# Altium PCB PCB_3U_DAC_BNC_Adapter.PCBDOC
Units mm, origin at the board's own origin, x right, y up, seen from the top; angles counter-clockwise.
Board outline 44.81 x 100 mm, 4 copper layers (TopLayer, Internal Plane 2, Signal Layer 1, BottomLayer), stack 1.563 mm thick; 29 components, 43 nets, 118 pads, 20 vias.
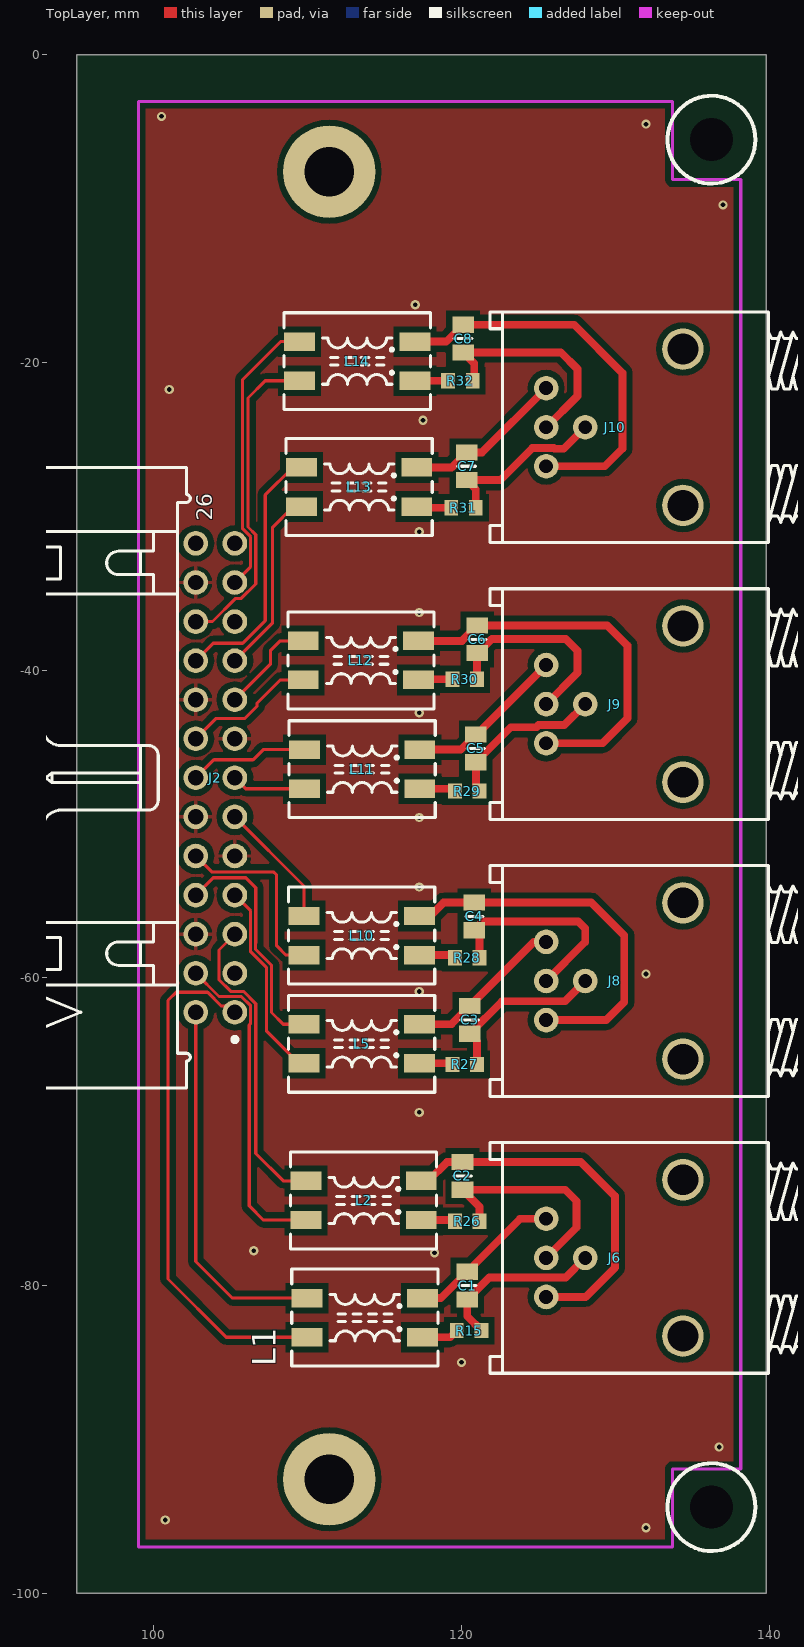
[diagram p0: TopLayer view]
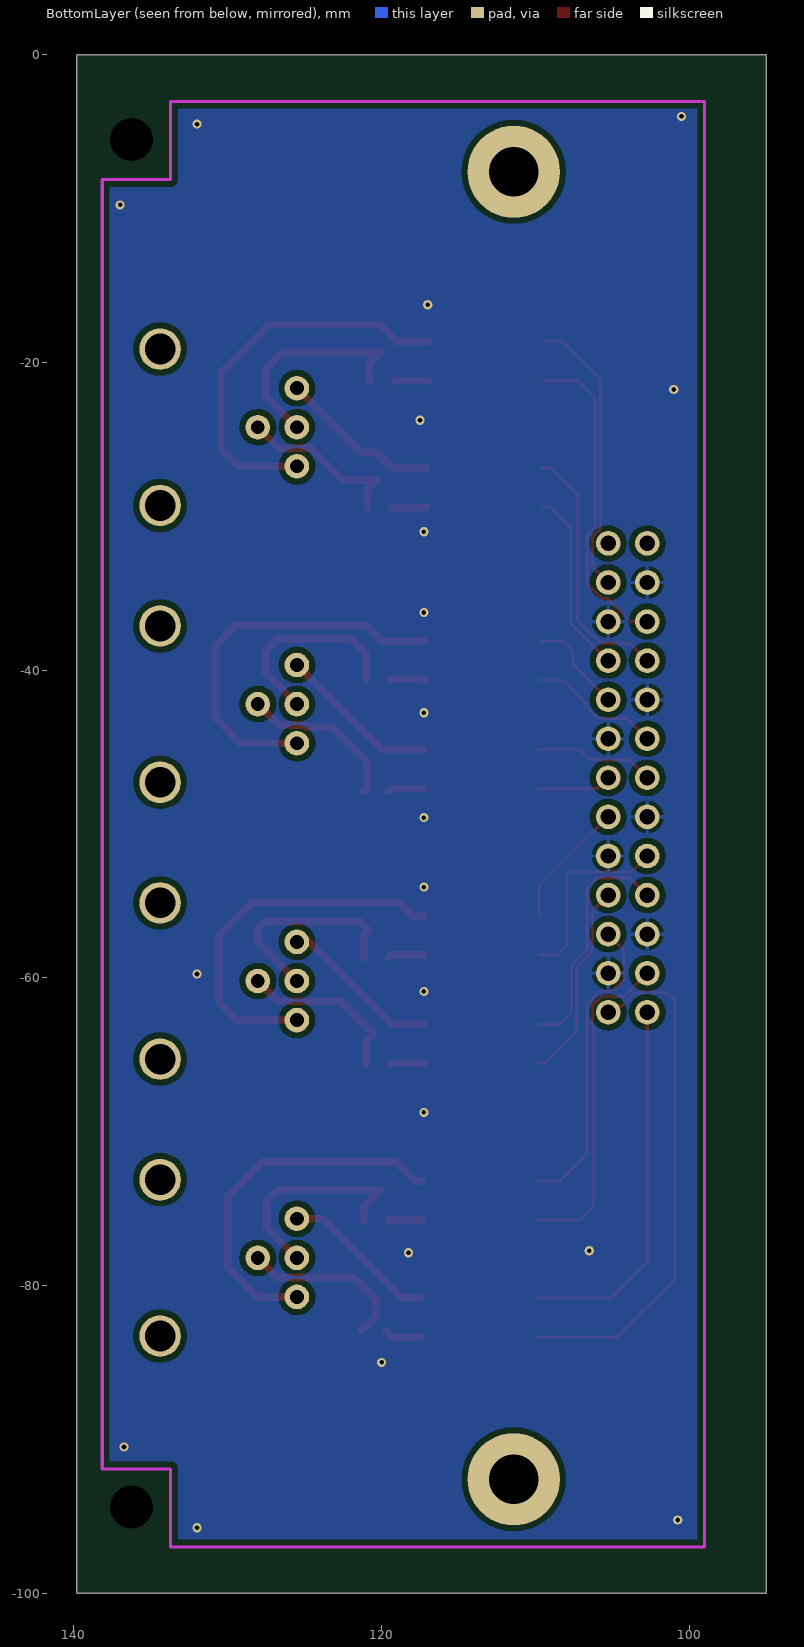
[diagram p1: BottomLayer view, seen from below]
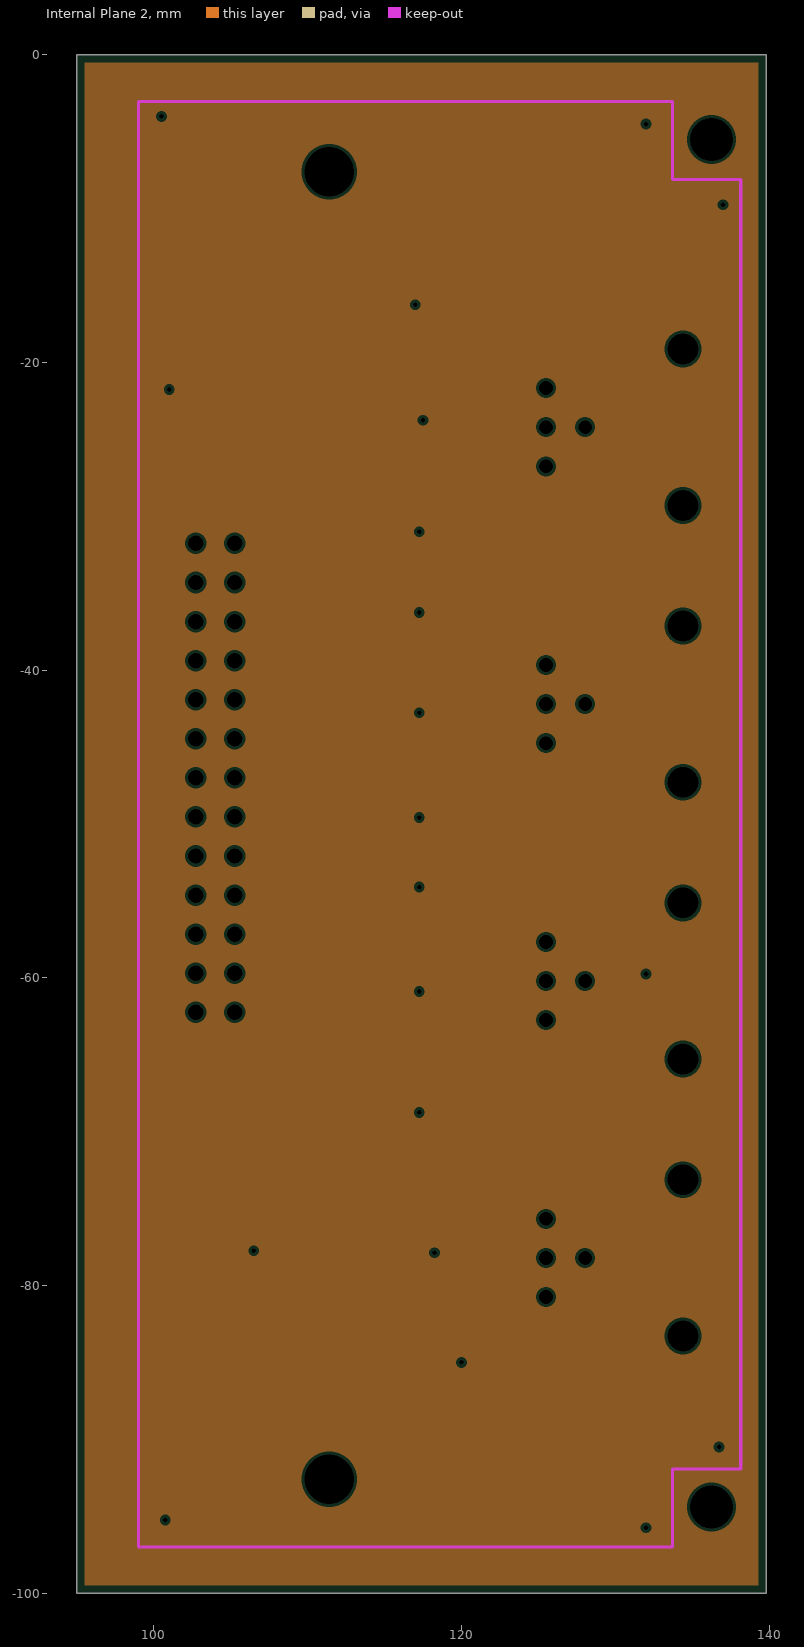
[diagram p2: Internal Plane 2, clearances drawn from the general rule]
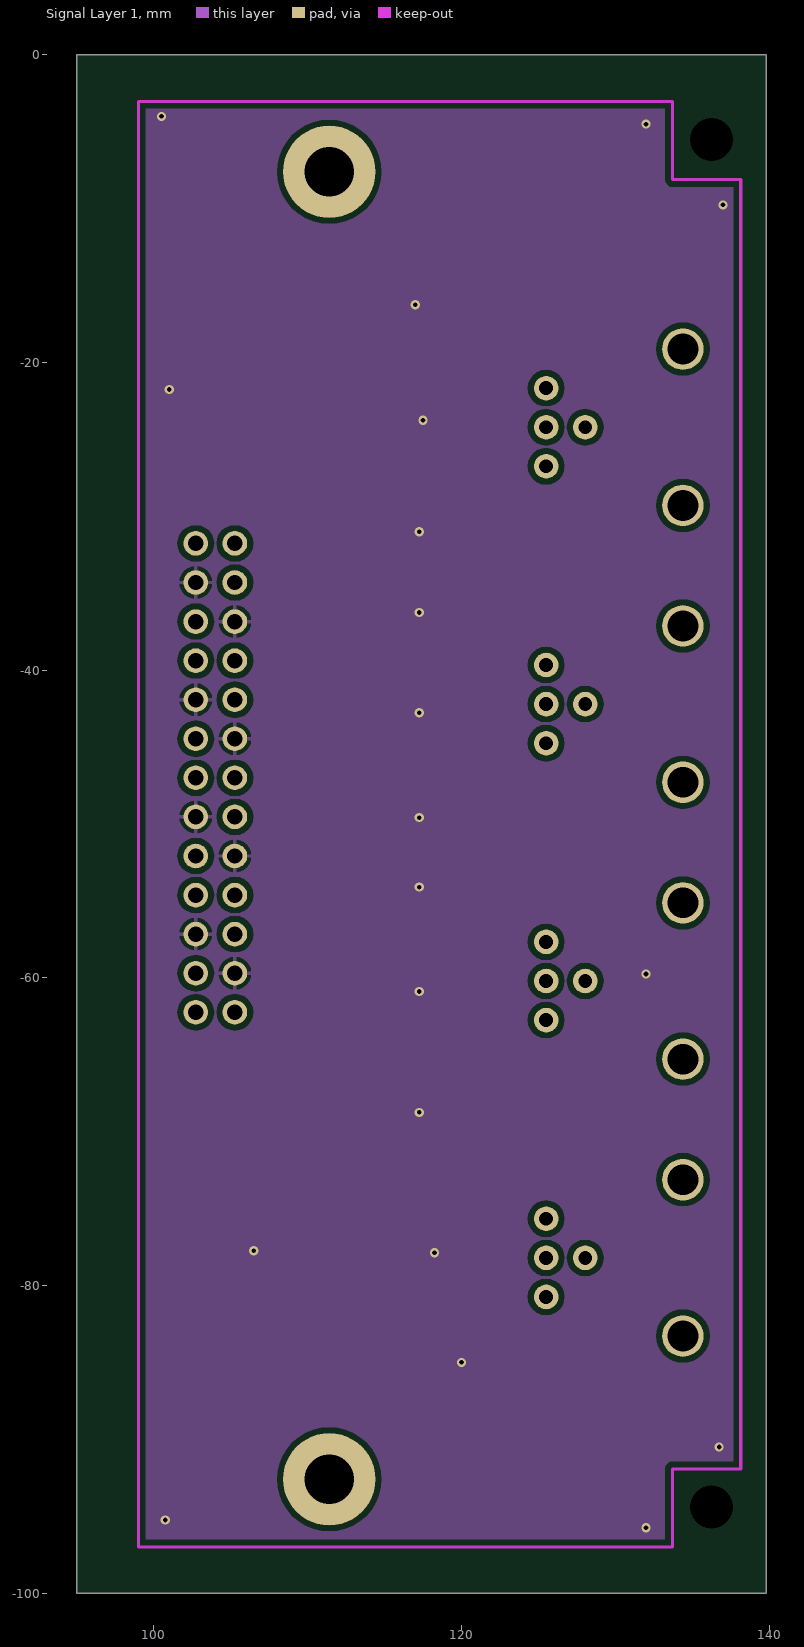
[diagram p3: Signal Layer 1]
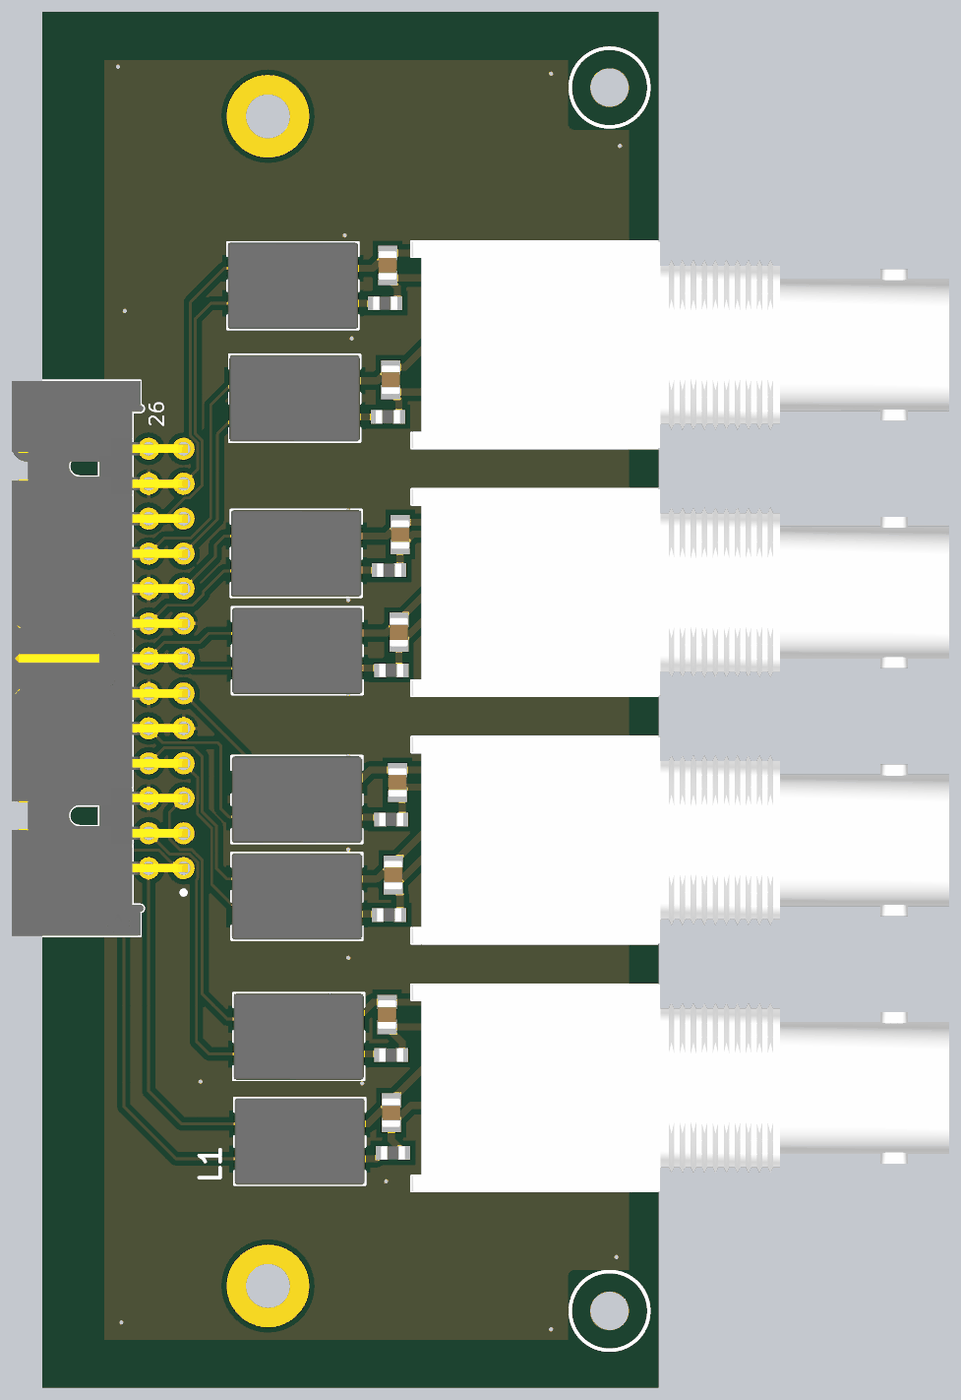
[diagram p4: 3D render of the assembled board from above, using the file's embedded part models]

## Layer stack, top to bottom
TopSolder: solder mask 0.0102, Solder Resist, Dk 3.5
TopLayer: signal copper 0.0356
Dielectric1: core 0.36, FR-4, Dk 4.8
Internal Plane 2: plane copper 0.036
Dielectric 3: prepreg 0.7, Dk 4.2
Signal Layer 1: signal copper 0.036
Dielectric 5: core 0.36, Dk 4.2
BottomLayer: signal copper 0.0356
BottomSolder: solder mask 0.0102, Solder Resist, Dk 3.5

## Board outline
95,-100 95,0 139.809,0 139.809,-100

## Design rules (kind name [scope] priority, off if disabled: settings)
Clearance Clearance_DIFF [(InDifferentialPairClass('All Differential Pairs')and IsTrack ) vs (InDifferentialPairClass('All Differential Pairs') and IsTrack  )] p1 off: gap=0.508 except(0.127: SMDPad-SMDPad SMDPad-THPad SMDPad-Via SMDPad-Fill SMDPad-Poly SMDPad-Region SMDPad-Text THPad-THPad THPad-Via THPad-Fill THPad-Poly THPad-Region THPad-Text Via-Via Via-Fill Via-Poly Via-Region Via-Text)
Clearance [All] p2: gap=0.127 except(0.381: Arc-Poly Track-Poly SMDPad-Poly THPad-Poly Via-Poly Fill-Poly Poly-Poly)
ComponentClearance [All] p1: gap=0 collisioncheckmode=3 verticalgap=2540 showdistances=FALSE
DiffPairsRouting [All] p1: maxlimit=0.152 minlimit=0.127 mostfreqgap=0.152 toplayer_minwidth=0.127 toplayer_maxwidth=0.152 toplayer_prefwidth=0.152 midlayer1_minwidth=0.127 midlayer1_maxwidth=0.152 midlayer1_prefwidth=0.152 bottomlayer_minwidth=0.127 bottomlayer_maxwidth=0.152 bottomlayer_prefwidth=0.152 maxuncoupledlength=12.7
FabricationTestPointUsage TestPointUsage [All] p1: valid=0 allowmultiple=FALSE
FabricationTestpoint Testpoint [All] p1: side=3 testpointundercomponent=TRUE minsize=1.016 maxsize=2.54 preferedsize=1.524 minholesize=0.508 maxholesize=1.016 preferedholesize=0.813 testpointgrid=0.025 allowsidetop=TRUE allowsidebottom=TRUE usegrid=TRUE gridtolerance=0
Height [All] p1: minheight=0 maxheight=40 prefheight=40
HoleSize [All] p1: absolutevalues=TRUE maxlimit=3.81 minlimit=0.025 maxpercent=80.000 minpercent=20.000
HoleToHoleClearance [All] p1: gap=0.025 allowstackedmicrovias=TRUE
MinimumSolderMaskSliver [All] p1: minsoldermaskwidth=0
PlaneClearance [All] p1: clearance=0.2
PlaneConnect [All] p1: planeconnectstyle=Direct reliefexpansion=0.508 reliefentries=4 reliefconductorwidth=0.254 reliefairgap=0.254
PolygonConnect PolygonConnect_pad [(InPadClass('All Pads'))] p1: connectstyle=Relief reliefconductorwidth=0.254 reliefentries=4 polygonreliefangle="90 Angle" airgapwidth=0.254
PolygonConnect [All] p2: connectstyle=Direct reliefconductorwidth=0.254 reliefentries=4 polygonreliefangle="45 Angle" airgapwidth=0.254
RoomDefinition PCB_3U_DAC_BNC_Adapter [InComponentClass('PCB_3U_DAC_BNC_Adapter')] p1: confinementstyle=ConfineIn formatcopy=TRUE lockcomponents=FALSE outline 96,-99.75 98.5,-99.75 98.5,-83.5 96,-83.5
RoutingVias [All] p1: holewidth=0.2 width=0.5 viastyle="Through Hole" minholewidth=0.2 minwidth=0.5 maxholewidth=0.711 maxwidth=1.27
SilkToSilkClearance [All] p1: silktosilkclearance=0
SilkToSolderMaskClearance SilkscreenOverComponentPads [IsPad] p1: minsilkscreentomaskgap=0 clearancetoexposedcopper=TRUE
SolderMaskExpansion [All] p1: expansion=0.051
ViasUnderSMD [All] p1: allowed=FALSE
Width [All] p1: maxlimit=1.27 minlimit=0.127 preferedwidth=0.127
18 further rules are at their usual default settings.

## Components (designator, comment, footprint, x,y, rotation, side; value= is the part's Value field where it differs from the comment)
C1 "Undefined" CAPC2012X135N 120.373,-80.01 r270 top
C2 "Undefined" CAPC2012X135N 120.068,-72.873 r270 top
C3 "Undefined" CAPC2012X135N 120.525,-62.738 r270 top
C4 "Undefined" CAPC2012X135N 120.83,-56.007 r270 top
C5 "Undefined" CAPC2012X135N 120.937,-45.089 r270 top
C6 "Undefined" CAPC2012X135N 121.033,-37.994 r270 top
C7 "Undefined" CAPC2012X135N 120.337,-26.745 r270 top
C8 "Undefined" CAPC2012X135N 120.108,-18.439 r270 top
J2 "Header 26" 3M_N2526-5002RB 104,-47 r90 top
J6 "BNC" BOMAR_364A2595 131.707,-78.206 r0 top
J8 "BNC" BOMAR_364A2595 131.707,-60.206 r0 top
J9 "BNC" BOMAR_364A2595 131.707,-42.206 r0 top
J10 "BNC" BOMAR_364A2595 131.707,-24.206 r0 top
L1 "2x6.5mH" IND_WURTH_WE-SL2 113.718,-82.093 r180 top
L2 "2x6.5mH" IND_WURTH_WE-SL2 113.642,-74.473 r180 top
L5 "2x6.5mH" IND_WURTH_WE-SL2 113.515,-64.287 r180 top
L10 "2x6.5mH" IND_WURTH_WE-SL2 113.515,-57.252 r180 top
L11 "2x6.5mH" IND_WURTH_WE-SL2 113.546,-46.435 r180 top
L12 "2x6.5mH" IND_WURTH_WE-SL2 113.464,-39.365 r180 top
L13 "2x6.5mH" IND_WURTH_WE-SL2 113.352,-28.091 r180 top
L14 "2x6.5mH" IND_WURTH_WE-SL2 113.225,-19.912 r180 top
R15 "0" RESC1608X55N 120.5,-82.931 r180 top
R26 "0" RESC1608X55N 120.373,-75.819 r180 top
R27 "0" RESC1608X55N 120.22,-65.634 r180 top
R28 "0" RESC1608X55N 120.373,-58.699 r180 top
R29 "0" RESC1608X55N 120.378,-47.858 r180 top
R30 "0" RESC1608X55N 120.22,-40.584 r180 top
R31 "0" RESC1608X55N 120.134,-29.437 r180 top
R32 "0" RESC1608X55N 119.93,-21.182 r180 top

## Footprints (in the part's own frame and the unit in brackets; to place one, negate y for a bottom-side part, rotate by r counter-clockwise, add the part's x,y. Pads: shape width x height; smd on the part's side, far side on the other; paste and mask are expansions set on the pad)
3M_N2526-5002RB [mm] "26 Contacts - Right Angle .100\" x .100\" Low Profile Four-Wall Header"
  round 1.6 hole 1: 1(-15.24,-1.27) 2(-15.24,1.27) 3(-12.7,-1.27) 4(-12.7,1.27) 5(-10.16,-1.27) 6(-10.16,1.27) 7(-7.62,-1.27) 8(-7.62,1.27) 9(-5.08,-1.27) 10(-5.08,1.27) 11(-2.54,-1.27) 12(-2.54,1.27) 13(0,-1.27) 14(0,1.27) 15(2.54,-1.27) 16(2.54,1.27) 17(5.08,-1.27) 18(5.08,1.27) 19(7.62,-1.27) 20(7.62,1.27) 21(10.16,-1.27) 22(10.16,1.27) 23(12.7,-1.27) 24(12.7,1.27) 25(15.24,-1.27) 26(15.24,1.27)
  silkscreen extent -20.16,-1.42 20.17,11.28, body extent -20.16,-1.59 20.17,11.27, height 8.64
BOMAR_364A2595 [mm] "Dual Right Angle 50 Ohm BNC Jack, White Valox Case"
  round 1.6 hole 0.9: 1(-6.2,2.54) 2(-6.2,0) 3(-6.2,-2.54) 4(-3.66,0)
  round 2.7 hole 2: 6(2.69,-5.08) 7(2.69,5.08)
  silkscreen extent -9.85,-7.5 17.35,7.5, body extent -9.85,-7.5 29.25,7.5, height 29.3
CAPC2012X135N [mm] "Chip Capacitor, Body 2.0x1.25mm, IPC Medium Density"
  rect 1.05x1.4 smd: 1(-0.9,0) 2(0.9,0)
  silkscreen extent 0,-0.58 0,0.58, body extent -1.05,-0.67 1.05,0.68, height 1.25
IND_WURTH_WE-SL2 [mm] "Common Mode SMD Line Filter WE-SL2"
  rect 2x1.2 smd: 1(-3.75,1.27) 2(-3.75,-1.27) 3(3.75,-1.27) 4(3.75,1.27)
  silkscreen extent -4.75,-3.15 4.75,3.15, body extent -4.75,-3.15 4.75,3.15, height 5.3
RESC1608X55N [mm] "Chip Resistor, EIA 0603, Metric 1608, Body 1.6x0.8mm, IPC Medium Density"
  rect 0.9x1 smd: 1(-0.8,0) 2(0.8,0)
  body extent -0.87,-0.47 0.88,0.48, height 0.55

## Part data
C1 C2 C3 C4 C5 C6 C7 C8: library part CC0805_NO-VALUE, "Non-polarised capacitor"
J2: library part 3M_N2526-5002RB, "Connector 26 Male"
J6 J8 J9 J10: library part BOMAR_364A2595, "Dual Right Angle 50 Ohm BNC Jack, White Valox Case"
L1 L2 L5 L10 L11 L12 L13 L14: library part IND_6.5MH_50%_WURTH_WE-SL2-744229, "Inductor Common Mode"
R15 R26 R27 R28 R29 R30 R31 R32: library part R0603_0R_JUMPER, "Resistor"

## Free pads (board coordinates)
  round 1.27 hole 2.794: 1(136.253,-94.412) 2(136.253,-5.512)
  round 6 hole 3.2: 2(111.409,-92.6) 3(111.409,-7.6)

## Via types
v1: diameter 0.6, hole 0.3, TopLayer to BottomLayer, tented both sides, 20 vias

## Nets (pads, with @x,y where several pads share a name; then routed paths per layer and width w, separated by ;. In a path a pad name is that pad's centre, name@x,y a point inside that pad or via, vN(x,y) a via of type N, cw(c..) or ccw(c..) an arc to the next point about the centre after c; other vN are vias at no path point)
DAC_OUTN0: J2.2 L1.3 | length 24.4
  TopLayer w0.203: J2.2 102.73,-78.441 105.112,-80.823 L1.3
DAC_OUTN1: J2.5 L2.3 | length 20.2
  TopLayer w0.203: J2.5 104.241,-58.188 104.241,-60.126 104.996,-60.881 105.833,-60.881 106.629,-61.677 106.629,-71.417 108.414,-73.203 L2.3
DAC_OUTN2: J2.8 L5.3 | length 15.6
  TopLayer w0.203: J2.8 103.857,-53.492 105.976,-53.492 106.629,-54.145 106.629,-57.723 106.611,-57.741 106.611,-58.141 107.652,-59.182 107.652,-62.255 108.414,-63.017 L5.3
DAC_OUTN3: J2.11 L10.3 | length 8.3
  TopLayer w0.203: J2.11 109.765,-54.035 L10.3
DAC_OUTN4: J2.14 L11.3 | length 7.8
  TopLayer w0.203: J2.14 103.908,-45.822 106.458,-45.822 107.115,-45.165 L11.3
DAC_OUTN5: J2.17 L12.3 | length 6.5
  TopLayer w0.203: J2.17 107.576,-39.614 107.576,-38.735 108.216,-38.095 L12.3
DAC_OUTN6: J2.20 L13.3 | length 16.9
  TopLayer w0.203: J2.20 103.857,-38.252 105.773,-38.252 107.246,-36.779 107.246,-28.6 109.025,-26.821 L13.3
DAC_OUTN7: J2.23 L14.3 | length 18.6
  TopLayer w0.203: J2.23 106.299,-33.271 106.299,-31.334 105.773,-30.808 105.773,-21.107 108.238,-18.642 L14.3
DAC_OUTP0: J2.1 L1.4 | length 33.9
  TopLayer w0.203: J2.1 104.776,-61.746 104.679,-61.843 104.406,-61.843 103.498,-60.935 101.455,-60.935 100.921,-61.468 100.921,-79.578 104.706,-83.363 L1.4
DAC_OUTP1: J2.4 L2.4 | length 21.6
  TopLayer w0.203: J2.4 104.241,-61.211 105.696,-61.211 106.299,-61.814 106.299,-62.967 106.204,-63.061 106.204,-74.828 107.119,-75.743 L2.4
DAC_OUTP2: J2.7 L5.4 | length 13
  TopLayer w0.203: J2.7 106.299,-55.648 106.299,-57.586 106.281,-57.604 106.281,-58.277 107.322,-59.319 107.322,-63.449 109.43,-65.557 L5.4
DAC_OUTP3: J2.10 L10.4 | length 12.4
  TopLayer w0.203: J2.10 103.759,-53.108 107.776,-53.108 107.982,-53.315 107.982,-57.912 108.592,-58.522 L10.4
DAC_OUTP4: J2.13 L11.4 | length 4.8
  TopLayer w0.203: J2.13 105.975,-47.705 L11.4
DAC_OUTP5: J2.16 L12.4 | length 8.7
  TopLayer w0.203: J2.16 104.061,-43.129 105.925,-43.129 106.712,-42.342 106.712,-42.139 108.216,-40.635 L12.4
DAC_OUTP6: J2.19 L13.4 | length 12.1
  TopLayer w0.203: J2.19 107.728,-36.921 107.728,-30.697 109.064,-29.361 L13.4
DAC_OUTP7: J2.22 L14.4 | length 21
  TopLayer w0.203: J2.22 103.815,-36.84 105.327,-35.328 105.696,-35.328 106.629,-34.396 106.629,-31.197 106.128,-30.696 106.128,-22.301 107.247,-21.182 L14.4
GNDP: J2.3 J2.6 J2.9 J2.12 J2.15 J2.18 J2.21 J2.24
  other v1: 132,-95.75 100.75,-95.25 136.75,-90.5 120,-85 118.25,-77.873 106.5,-77.75 117.25,-68.75 117.25,-60.887 132,-59.75 117.25,-54.102 117.25,-49.585 117.25,-42.765 117.25,-36.25 117.25,-31 117.5,-23.75 101,-21.75 117,-16.25 137,-9.75 132,-4.5 100.5,-4
N13V0_SCSI: J2.26
NetC1_1: C1.1 J6.1 L1.2 | length 10.2
  TopLayer w0.508: L1.2 118.66,-80.823 C1.1 123.817,-75.666 J6.1
NetC1_2: C1.2 J6.4 R15.1 | length 11.2
  TopLayer w0.508: R15.1 120.373,-82.004 C1.2 121.806,-79.477 126.778,-79.477 128.047,-78.208 J6.4
NetC2_1: C2.1 J6.3 L2.2 | length 23.9
  TopLayer w0.508: L2.2 117.838,-73.203 119.068,-71.973 C2.1 127.758,-71.973 129.979,-74.193 129.979,-78.842 128.074,-80.746 J6.3
NetC2_2: C2.2 J6.2 R26.1 | length 14.7
  TopLayer w0.508: R26.1 121.173,-74.877 C2.2 126.739,-73.773 127.49,-74.524 127.49,-76.223 J6.2
NetC3_1: C3.1 J8.1 L5.2 | length 10.5
  TopLayer w0.508: L5.2 119.346,-63.017 C3.1 124.697,-57.666 J8.1
NetC3_2: C3.2 J8.4 R27.1 | length 11.1
  TopLayer w0.508: R27.1 121.02,-64.133 C3.2 122.644,-61.519 126.734,-61.519 J8.4
NetC4_1: C4.1 J8.3 L10.2 | length 24.5
  TopLayer w0.508: L10.2 117.965,-55.982 118.839,-55.107 C4.1 128.444,-55.107 130.588,-57.252 130.588,-61.57 129.412,-62.746 J8.3
NetC4_2: C4.2 J8.2 R28.1 | length 14
  TopLayer w0.508: R28.1 121.173,-57.25 C4.2 121.4,-56.337 127.591,-56.337 128.048,-56.794 128.048,-57.664 J8.2
NetC5_1: C5.1 J9.1 L11.2 | length 10.5
  TopLayer w0.508: L11.2 119.961,-45.165 C5.1 120.984,-44.189 J9.1
NetC5_2: C5.2 J9.4 R29.1 | length 10.6
  TopLayer w0.508: R29.1 120.937,-47.616 C5.2 123.213,-43.713 124.869,-43.713 125.017,-43.565 126.688,-43.565 J9.4
NetC6_1: C6.1 J9.3 L12.2 | length 25.2
  TopLayer w0.508: L12.2 120.032,-38.095 C6.1 129.48,-37.094 130.792,-38.405 130.792,-43.129 129.175,-44.746 J9.3
NetC6_2: C6.2 J9.2 R30.1 | length 13.2
  TopLayer w0.508: R30.1 121.02,-38.93 121.978,-37.973 126.778,-37.973 127.54,-38.735 127.54,-40.172 J9.2
NetC7_1: C7.1 J10.1 L13.2 | length 10.5
  TopLayer w0.508: L13.2 119.361,-26.821 C7.1 121.328,-25.845 J10.1
NetC7_2: C7.2 J10.4 R31.1 | length 11.2
  TopLayer w0.508: R31.1 120.934,-28.242 C7.2 122.527,-27.645 124.607,-25.565 125.996,-25.565 126.034,-25.603 126.65,-25.603 J10.4
NetC8_1: C8.1 J10.3 L14.2 | length 25.6
  TopLayer w0.508: L14.2 119.005,-18.642 C8.1 127.325,-17.539 130.461,-20.676 130.461,-25.603 129.318,-26.746 J10.3
NetC8_2: C8.2 J10.2 R32.1 | length 14.7
  TopLayer w0.508: R32.1 120.835,-21.078 120.835,-20.066 C8.2 126.458,-19.339 127.54,-20.422 127.54,-22.172 J10.2
NetL1_1: L1.1 R15.2 | length 2.4
  TopLayer w0.508: L1.1 119.268,-83.363 R15.2
NetL2_1: L2.1 R26.2 | length 2.2
  TopLayer w0.508: L2.1 119.497,-75.743 R26.2
NetL5_1: L5.1 R27.2 | length 2.2
  TopLayer w0.508: L5.1 119.344,-65.557 R27.2
NetL10_1: L10.1 R28.2 | length 2.4
  TopLayer w0.508: L10.1 119.395,-58.522 R28.2
NetL11_1: L11.1 R29.2 | length 2.3
  TopLayer w0.508: L11.1 119.426,-47.705 R29.2
NetL12_1: L12.1 R30.2 | length 2.2
  TopLayer w0.508: L12.1 117.265,-40.584 R30.2
NetL13_1: L13.1 R31.2 | length 2.3
  TopLayer w0.508: L13.1 117.178,-29.437 R31.2
NetL14_1: L14.1 R32.2 | length 2.2
  TopLayer w0.508: L14.1 R32.2
P13V0_SCSI: J2.25
pads on no net: J6.6 J6.7 J8.6 J8.7 J9.6 J9.7 J10.6 J10.7

## Polygon pours and split planes (outlines as drawn)
GNDP on Signal Layer 1 "L3-No Net" (solid, remove dead copper, pour order 64): 139.809,0 139.809,-100 95,-100 95,0
no net on Signal Layer 1 "L3-No Net" (solid, remove dead copper, shelved, pour order 8): 278,100.25 310,100.25 309.809,100.059 309.809,0.5 278.25,0.5 278,0.25
GNDP on BottomLayer "L3-No Net" (solid, remove dead copper, pour order 66): 139.809,0 139.809,-100 95,-100 95,0
no net on BottomLayer "L3-No Net" (solid, remove dead copper, shelved, pour order 16): 278.107,100.5 278.357,100.25 309.857,100.25 309.857,0 310.107,-0.25 309.857,0 278.107,0
GNDP on TopLayer "L3-No Net" (solid, remove dead copper, pour order 68): 139.809,0 139.809,-100 95,-100 95,0
no net on TopLayer "L3-No Net" (solid, remove dead copper, shelved, pour order 24): 278.25,99.75 309.809,99.75 310.059,100 310.25,99.809 310.25,-0.5 277.75,-0.5
no net on Internal Plane 2 (split plane): 139.299,-99.489 95.51,-99.489 95.51,-0.51 139.299,-0.51

## Keep-outs
KeepOutLayer:
  lines w0.203: 99,-97.003 99,-3.023 133.713,-3.023 133.713,-8.103 138.158,-8.103 138.158,-91.923 133.713,-91.923 133.713,-97.003 99,-97.003

## Silkscreen, mask and mechanical layers (free items; w line width, h text height)
TopOverlay:
  circle w0.254: c136.253,-94.412 r2.857
  circle w0.254: c136.253,-5.512 r2.857
Mechanical1:
  lines w0.1: 126.809,-50.191 126.809,-50 ; 95,-100 139.809,-100 139.809,0 95,0 95,-42 95,-52 95,-100

## Text inside footprints (layer, text, board x,y; h text height)
J2: TopOverlay "26" at 103.794,-30.275 h1.02 r90; Mechanical14 "26" at 103.794,-30.275 h1.02 r90